# Altium PCB Dual_color_SOMM.PcbDoc
Units mm, origin at the board's own origin, x right, y up, seen from the top; angles counter-clockwise.
Board outline 64.9 x 67.18 mm, 2 copper layers (Top Layer, Bottom Layer); 5 components, 7 nets, 40 pads, 2 vias.
Unrouted connection lines stored in the file: 4.
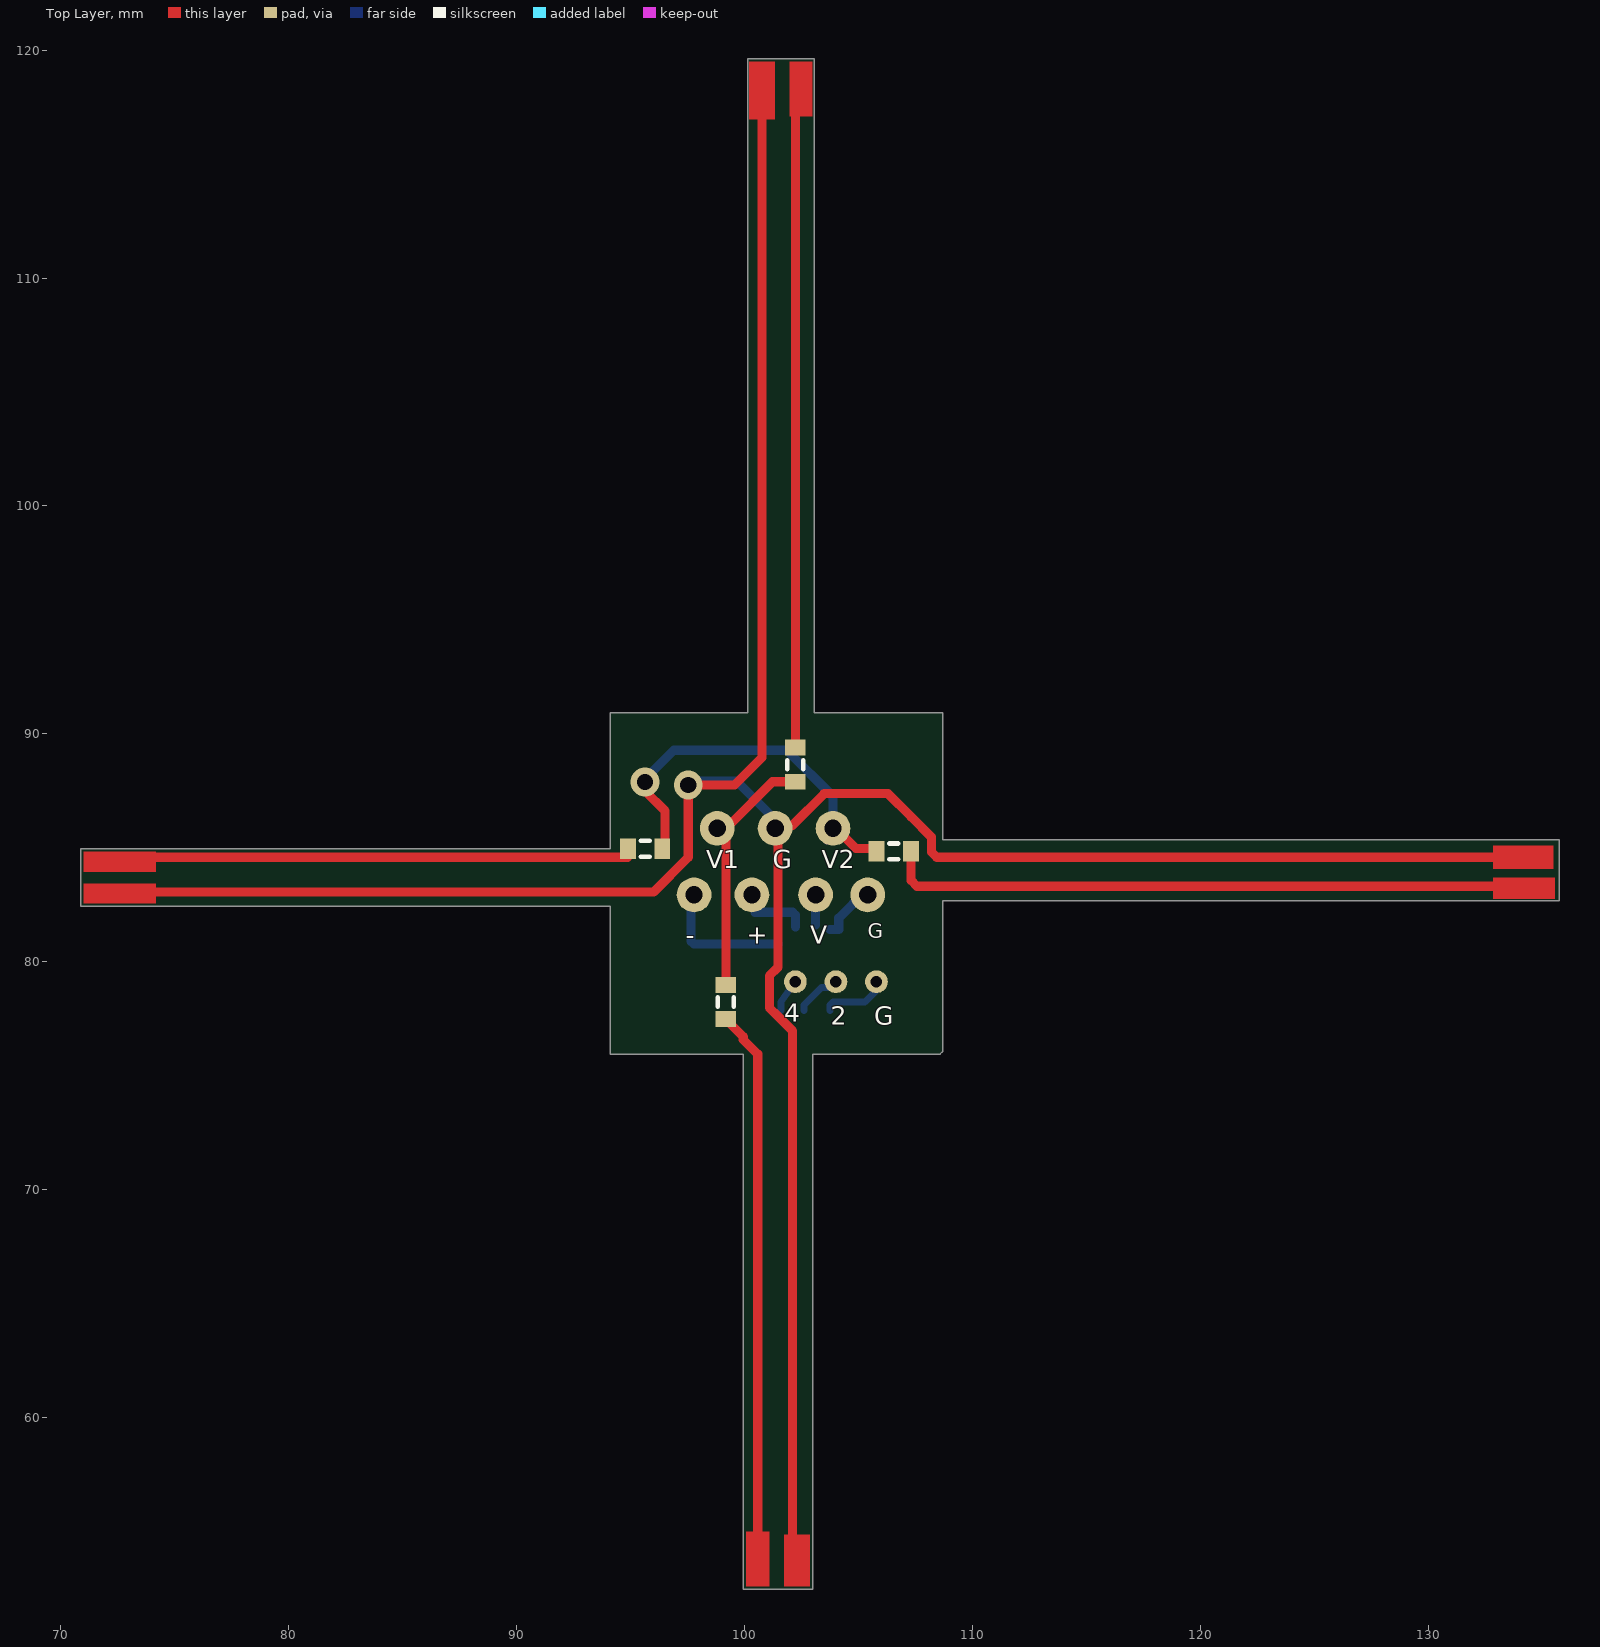
[diagram p0: Top Layer view]
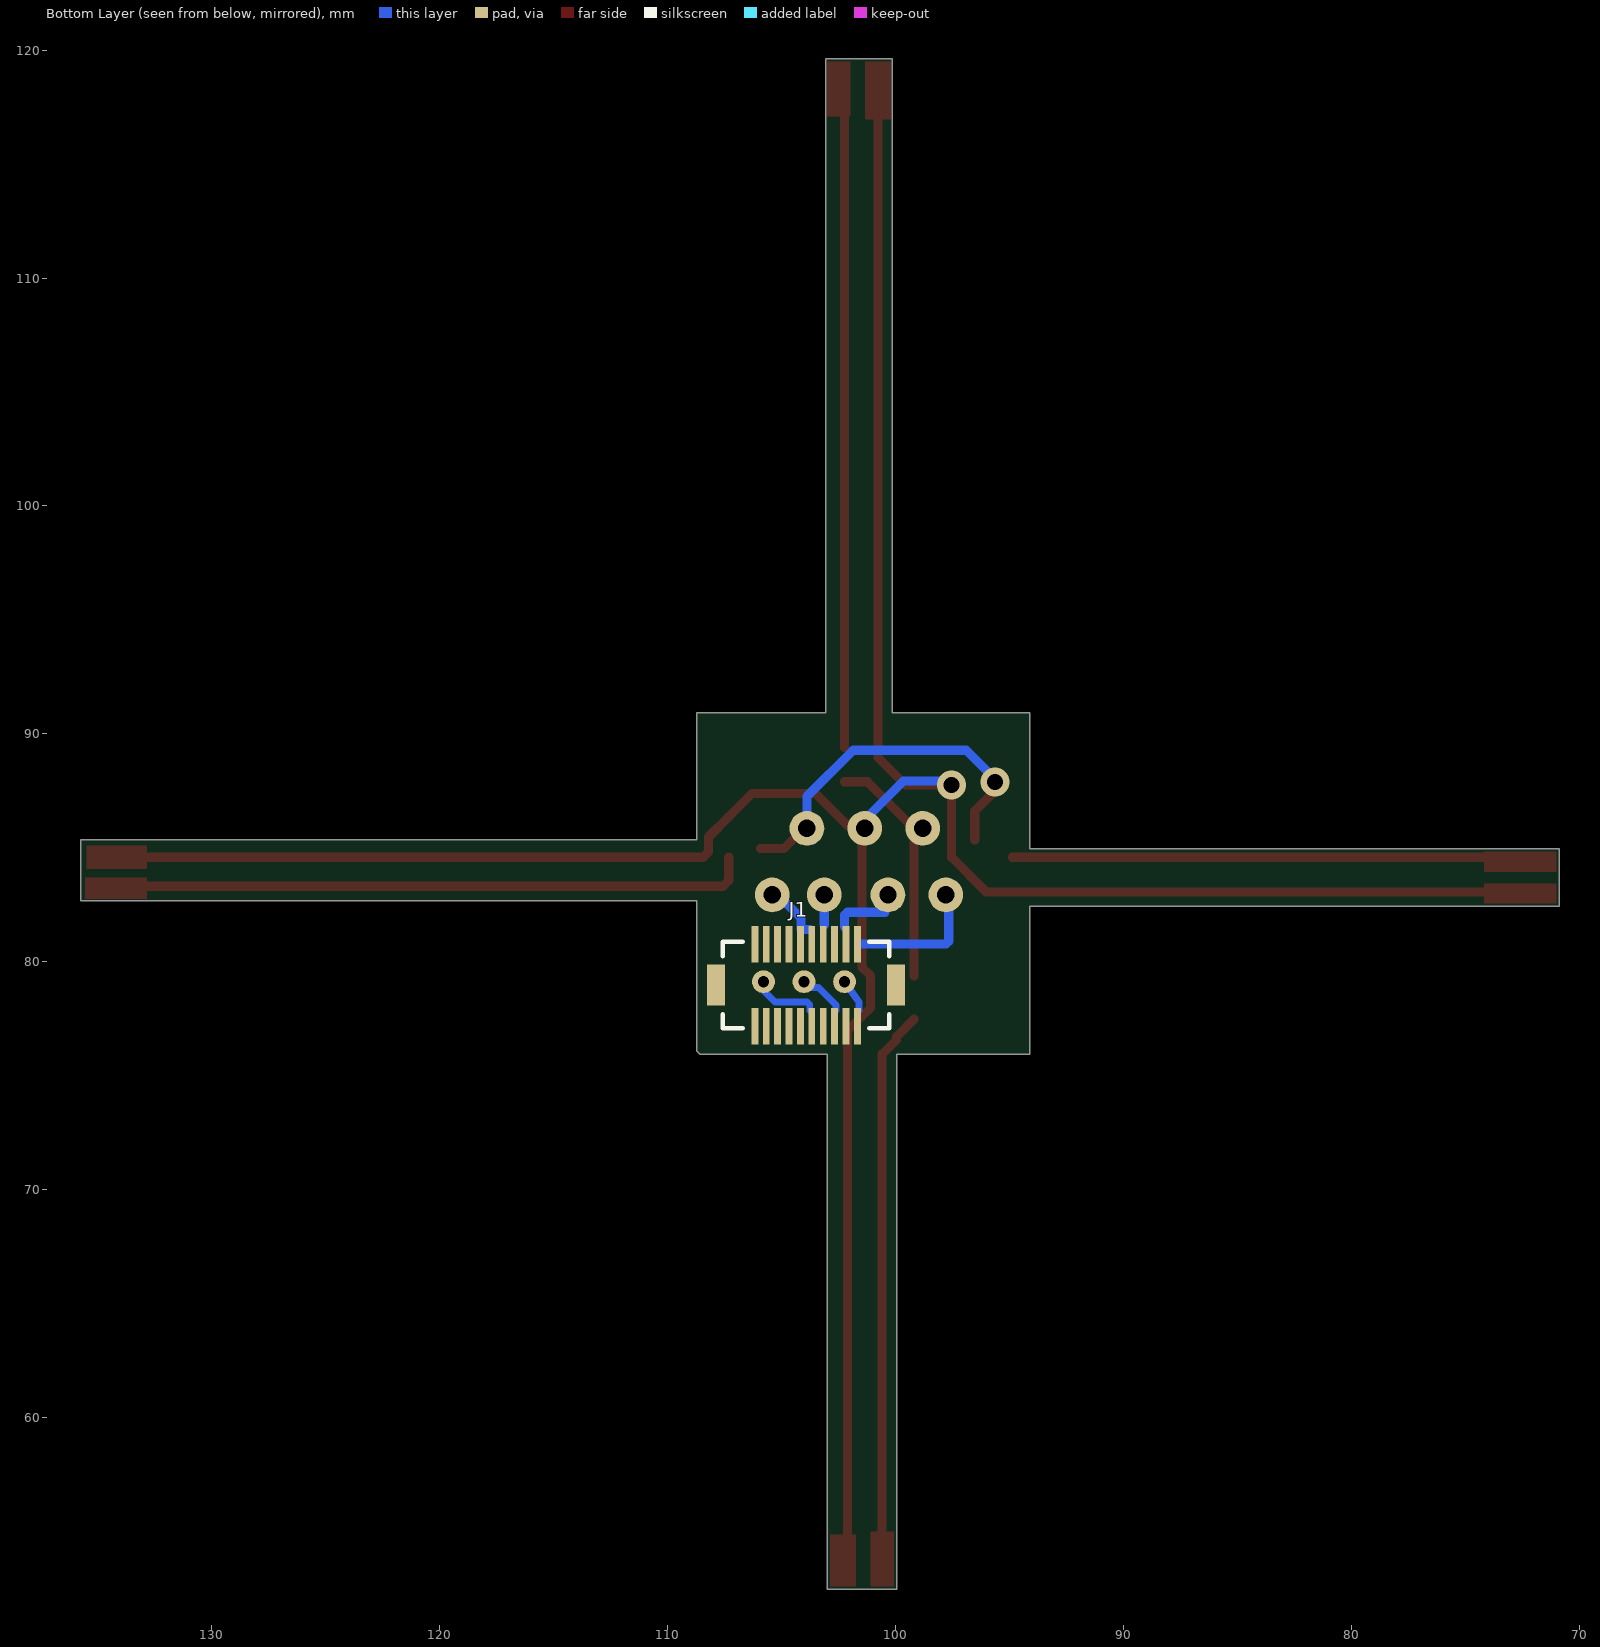
[diagram p1: Bottom Layer view, seen from below]

## Layer stack, top to bottom
Stack2 Top Coverlay: solder mask 0.0102, Solder Resist, Dk 3.5
Stack2 Top Coverlay: solder mask 0.012, FC-001, Dk 4
Top Layer: signal copper 0.0356
Dielectric 1: dielectric 0.32, FR-4, Dk 4.8
Bottom Layer: signal copper 0.0356
Bottom Solder: solder mask 0.012, FC-001, Dk 4
Bottom Solder: solder mask 0.0102, Solder Resist, Dk 3.5

## Board outline
70.866,82.423 94.107,82.423 94.107,75.946 99.949,75.946 99.949,52.451 102.997,52.451 102.997,75.946 108.585,75.946 108.712,76.073 108.712,82.677 135.763,82.677 135.763,85.344 108.712,85.344 108.712,90.932 103.061,90.932 103.06,119.634 100.139,119.634 100.139,90.932 94.107,90.932 94.107,84.963 70.866,84.963
board region "Layer Stack Region 1": 94.107,90.932 94.107,75.946 108.585,75.946 108.712,76.073 108.712,90.932
board region "Layer Stack Region 2": 100.139,90.932 103.06,90.932 103.06,119.634 100.139,119.634
board region "Layer Stack Region 3": 108.712,82.677 135.763,82.677 135.763,85.344 108.712,85.344
board region "Layer Stack Region 4": 99.949,52.451 102.997,52.451 102.997,75.946 99.949,75.946
board region "Layer Stack Region 5": 70.866,82.423 94.107,82.423 94.107,84.963 70.866,84.963

## Design rules (kind name [scope] priority, off if disabled: settings)
Clearance [All] p1: gap=0.254 ignorepadtopadclearanceinfootprint=FALSE except(0: Arc-Hole Track-Hole SMDPad-Hole THPad-Hole Via-Hole Fill-Hole Poly-Hole Region-Hole Text-Hole)
DiffPairsRouting [All] p1: maxlimit=0.254 minlimit=0.254 mostfreqgap=0.254 substack1={F8016A08-3B0F-404E-A835-5061FC026317} toplayer_{f8016a08-3b0f-404e-a835-5061fc026317}_minwidth=0.381 toplayer_{f8016a08-3b0f-404e-a835-5061fc026317}_maxwidth=0.381 toplayer_{f8016a08-3b0f-404e-a835-5061fc026317}_prefwidth=0.381 bottomlayer_{f8016a08-3b0f-404e-a835-5061fc026317}_minwidth=0.381 bottomlayer_{f8016a08-3b0f-404e-a835-5061fc026317}_maxwidth=0.381 bottomlayer_{f8016a08-3b0f-404e-a835-5061fc026317}_prefwidth=0.381 toplayer_minwidth=0.381 toplayer_maxwidth=0.381 toplayer_prefwidth=0.381 bottomlayer_minwidth=0.381 bottomlayer_maxwidth=0.381 bottomlayer_prefwidth=0.381 maxuncoupledlength=12.7
PolygonConnect [All] p1: connectstyle=Relief reliefconductorwidth=0.254 reliefentries=4 polygonreliefangle="90 Angle" airgapwidth=0.254
RoutingVias [All] p1: holewidth=0.711 width=1.27 viastyle="Through Hole" minholewidth=0.711 minwidth=1.27 maxholewidth=0.711 maxwidth=1.27
SolderMaskExpansion [All] p1: expansion=0.102 istentingtop=FALSE
Width [All] p1 off: maxlimit=0.254 minlimit=0.254 preferedwidth=0.254 substack1={F8016A08-3B0F-404E-A835-5061FC026317}
29 further rules are at their usual default settings.

## Components (designator, comment, footprint, x,y, rotation, side; value= is the part's Value field where it differs from the comment)
J1 "DF12B-20DS-0.5V(86)" FP-DF12B-20DS-0_5V_86-MFG 103.922,78.972 r0 bottom
R1 "Res3" J1-0603 102.235,88.646 r90 top value=10
R2 "Res3" J1-0603 99.187,78.232 r270 top value=10
R3 "Res3" J1-0603 106.553,84.836 r180 top value=10
R4 "Res3" J1-0603 95.643,84.963 r180 top value=10

## Footprints (in the part's own frame and the unit in brackets; to place one, negate y for a bottom-side part, rotate by r counter-clockwise, add the part's x,y. Pads: shape width x height; smd on the part's side, far side on the other; paste and mask are expansions set on the pad)
FP-DF12B-20DS-0_5V_86-MFG [mm]
  rect 0.3x1.6 smd paste-1000 mask+0: 1(-2.25,1.8) 2(-2.25,-1.8) 3(-1.75,1.8) 4(-1.75,-1.8) 5(-1.25,1.8) 6(-1.25,-1.8) 7(-0.75,1.8) 8(-0.75,-1.8) 9(-0.25,1.8) 10(-0.25,-1.8) 11(0.25,1.8) 12(0.25,-1.8) 13(0.75,1.8) 14(0.75,-1.8) 15(1.25,1.8) 16(1.25,-1.8) 17(1.75,1.8) 18(1.75,-1.8) 19(2.25,1.8) 20(2.25,-1.8)
  rect 0.8x1.8 smd paste+0 mask+0: 21(-3.95,0) 22(3.95,0)
  silkscreen extent -3.65,-1.9 3.65,1.9, body extent -4.05,-2.3 4.05,2.3, height 2.9
J1-0603 [mm] "Chip Resistor, Body 1.6x0.8mm, IPC High Density"
  rect 0.7x0.9 smd: 1(-0.75,0) 2(0.75,0)
  silkscreen extent -0.2,-0.35 0.2,0.35, body extent -0.85,-0.48 0.85,0.48, height 0.9

## Part data
J1: library part CMP-11605-000044-1, "CONN RCPT 20POS SMD GOLD", Contact Resistance=50mR, Current Rating=300mA, Housing Color=Beige, Max Operating Temperature=125°C, Max Voltage Rating (AC)=50V, Min Operating Temperature=-45°C, Package Quantity=1000, Connector Type=Receptacle, Contact Material=Copper, Contact Plating=Gold, Depth=3.6mm, Housing Material=Polyamide, Lead Free="Lead Free", Length=8mm, Mated Stacking Heights=5mm, Max Current Rating=300mA, Mount="Surface Mount", Number of Contacts=20, Number of Positions=20, Number of Rows=2, Orientation=Straight, Packaging="Tape and Reel", Pitch=0.5mm, Radiation Hardening=No, Stack Height=5mm, Termination=Solder, Voltage Rating=50V
R1 R2 R3 R4: "Resistor", LatestRevisionDate=29-May-2009, LatestRevisionNote="IPC-7351 Footprint Added.", PackageDescription="Chip Resistor", PackageReference=J1-0603, Published=8-Jun-2000, Publisher="Altium Limited"

## Free pads (board coordinates)
  round 1.524 hole 0.762: 8(105.41,82.931) 9(97.79,82.931) 10(100.33,82.931) 11(103.124,82.931) GND(101.346,85.852) V1(98.806,85.852) V2(103.886,85.852)
  round 1 hole 0.5: 12(105.791,79.121) 13(104.013,79.121) 14(102.235,79.121)

## Via types
v1: diameter 1.27, hole 0.711, Top Layer to Bottom Layer, 2 vias

## Nets (pads, with @x,y where several pads share a name; then routed paths per layer and width w, separated by ;. In a path a pad name is that pad's centre, name@x,y a point inside that pad or via, vN(x,y) a via of type N, cw(c..) or ccw(c..) an arc to the next point about the centre after c; other vN are vias at no path point)
GND: pad.GND
NetLED1_2: R1.2 | length 29.5
  Top Layer w0.4: R1.2 102.235,118.491 102.489,118.745
NetLED2_2: R2.2
NetLED3_2: R3.2
NetLED4_2: R4.2
V1: pad.V1 R1.1 R2.1
V2: pad.V2 R3.1 R4.1 | length 0.4
  Bottom Layer w0.4: pad.V2@103.632,85.344 pad.V2@103.886,85.598
pads on no net: J1.1 J1.2 J1.3 J1.4 J1.5 J1.6 J1.7 J1.8 J1.9 J1.10 J1.11 J1.12 J1.13 J1.14 J1.15 J1.16 J1.17 J1.18 J1.19 J1.20 J1.21 J1.22
copper on no net: | length 254.5
  Top Layer w0.4: 71.755,83.058 94.869,83.058 96.012,83.058 97.536,84.582 v1(97.536,87.757) 99.568,87.757 100.774,88.963 100.774,118.745 ; 72.189,84.582 94.869,84.582 ; v1@95.631,87.63 95.631,87.503 96.52,86.614 96.52,85.979 96.52,85.344 ; 99.187,77.482 99.187,77.47 99.949,76.708 99.949,76.581 100.584,75.946 100.584,54.102 ; 99.187,79.375 99.187,84.455 99.187,86.106 99.441,86.106 101.231,87.896 102.235,87.896 ; 101.473,85.725 101.473,84.455 101.473,79.883 101.473,79.756 101.092,79.375 101.092,77.978 101.473,77.597 102.108,76.962 102.108,76.581 102.108,53.467 ; 101.854,85.979 102.108,85.979 103.505,87.376 106.299,87.376 107.315,86.36 108.204,85.471 108.204,84.816 108.438,84.582 109.347,84.582 134.747,84.582 ; 103.886,85.852 104.013,85.852 104.902,84.963 105.727,84.963 ; 105.537,84.963 105.918,84.963 ; 107.315,84.582 107.315,83.566 107.569,83.312 134.366,83.312
  Bottom Layer w0.3: 101.6,77.851 101.6,78.232 102.235,79.121 ; 102.616,77.851 102.616,78.105 103.378,78.867 104.013,78.867 ; 103.759,77.851 103.759,78.105 103.886,78.232 105.283,78.232 105.918,78.867
  Bottom Layer w0.4: v1@95.631,88.265 95.885,88.265 96.901,89.281 101.854,89.281 103.886,87.249 103.886,86.106 ; v1(97.536,87.757) 97.702,87.923 99.656,87.923 101.06,86.519 ; 97.663,82.296 97.663,80.899 97.79,80.772 101.473,80.772 ; 99.06,85.852 99.06,85.979 ; 100.457,82.423 100.457,82.169 102.108,82.169 102.235,82.042 102.235,81.534 ; 101.092,85.598 101.092,86.487 ; 103.124,81.611 103.124,82.931 ; 103.759,81.407 104.14,81.407 104.14,81.915 104.775,82.55
  other v1: 95.631,87.884

## Other copper
Top Layer:
  rectangle: 100.076,52.578 101.092,54.991
  rectangle: 101.727,52.578 102.87,54.864
  rectangle: 132.842,82.74 135.572,83.693
  rectangle: 132.842,84.074 135.509,85.09
  rectangle: 70.993,82.55 74.168,83.439
  rectangle: 70.993,83.947 74.168,84.836
  rectangle: 100.203,116.967 101.346,119.507
  rectangle net NetLED1_2: 101.981,117.094 102.997,119.507

## Silkscreen, mask and mechanical layers (free items; w line width, h text height)
Top Overlay:
  text "V1" at 98.321,84.097 h0.8
  text "G" at 101.242,84.097 h0.8
  text "V2" at 103.401,84.097 h0.8
  text "G" at 105.41,81.026 h0.64
  text "+" at 100.099,80.789 h0.8
  text "V" at 102.893,80.795 h0.8
  text "-" at 97.432,80.776 h0.8
  text "4" at 101.75,77.366 h0.8
  text "2" at 103.782,77.239 h0.8
  text "G" at 105.687,77.239 h0.8
Top Paste:
  rectangle: 101.727,52.451 102.997,55.118
  rectangle: 99.949,52.451 101.092,55.118
  rectangle: 101.981,116.967 103.06,119.634
  rectangle: 100.139,116.967 101.346,119.634
  rectangle: 132.842,82.677 135.763,83.693
  rectangle: 132.842,84.074 135.763,85.344
  rectangle: 70.866,82.423 74.168,83.439
  rectangle: 70.866,83.947 74.168,84.963
Stack2 Top Coverlay:
  rectangle: 132.842,82.677 135.763,83.693
  rectangle: 132.842,84.083 135.763,85.344
  rectangle: 101.981,116.967 103.06,119.634
  rectangle: 100.139,116.967 101.346,119.634
  rectangle: 101.727,52.451 102.997,55.118
  rectangle: 99.949,52.451 101.092,55.118
  rectangle: 70.866,82.423 74.168,83.439
  rectangle: 70.866,83.947 74.295,84.963